# EAGLE board iBookG3Clamshell (EAGLE 9.6.2)
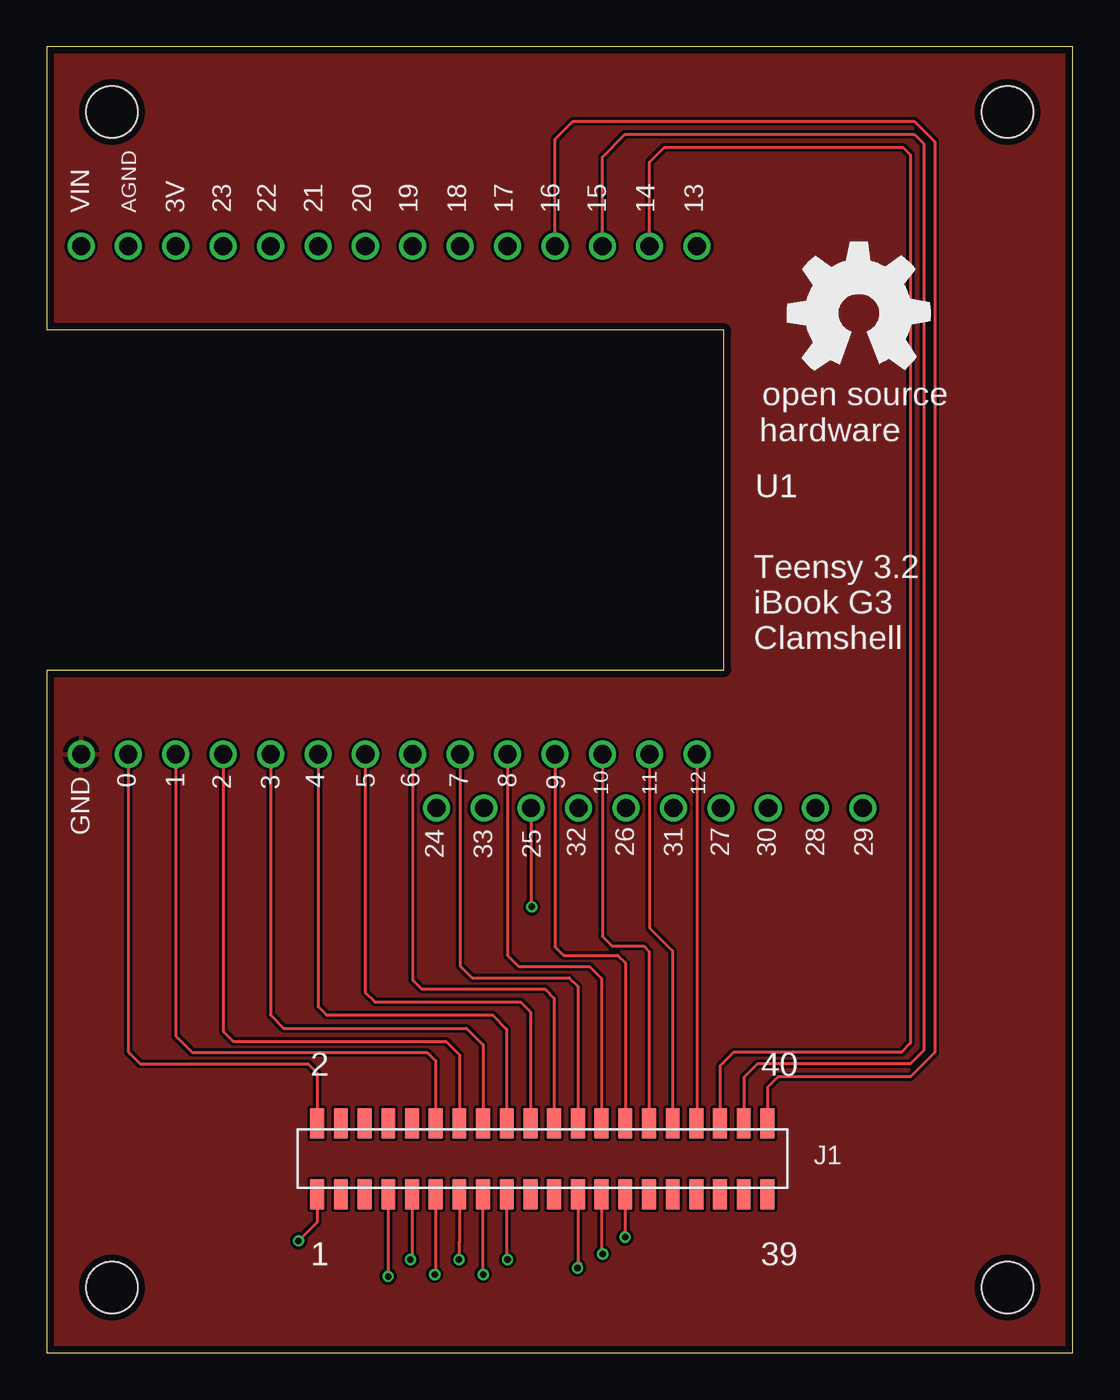
[diagram p0: board, top side]
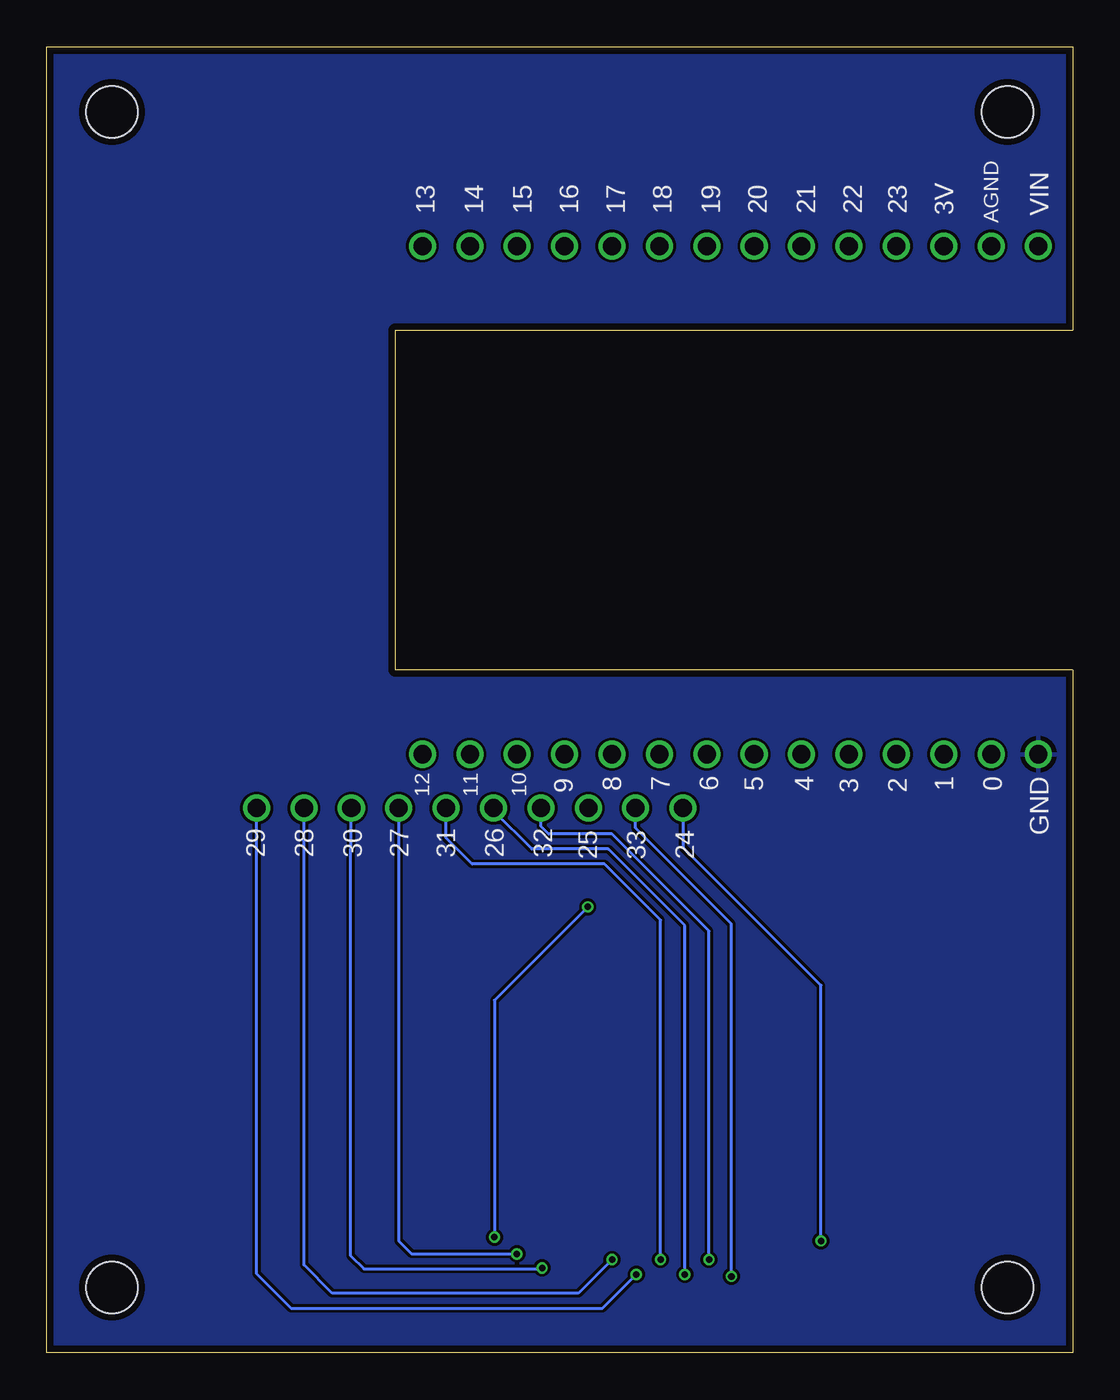
[diagram p1: board, bottom side, seen from below]

Size 55 x 70 mm. Coordinates in mm from the lower left corner, seen from the top.
Outline: 0,0 55,0 55,70 0,70 0,54.8 36.3,54.8 36.3,36.6 0,36.6 0,0
Copper layers (1*16): Top 0.035559375mm / dielectric 1.6mm / Bottom 0.035559375mm
Design rules "oshpark-2layer": minimum track width 6mil, minimum drill 10mil, track to track 6mil, track to pad 6mil, pad to pad 6mil, via to via 6mil, smd to smd 6mil, copper to edge 15mil, drill to drill 6mil, minimum pad ring 5mil, minimum via ring 5mil, stop-mask expansion 2.5mil, vias tented up to drill 0mil, thermal gap 10mil
Holes 2.75 mm at 3.5,66.5 3.5,3.5 51.5,3.5 51.5,66.5

## Footprints (pad centres in the part's own frame; a part is rotated, then mirrored left to right if it is on the bottom)
HDR127MET40FGVSMDR = smd 0.74 x 1.6: P$1 0,-0.8; P$2 0,3; P$3 1.27,-0.8; P$4 1.27,3; P$5 2.54,-0.8; P$6 2.54,3; P$7 3.81,-0.8; P$8 3.81,3; P$9 5.08,-0.8; P$10 5.08,3; P$11 6.35,-0.8; P$12 6.35,3; P$13 7.62,-0.8; P$14 7.62,3; P$15 8.89,-0.8; P$16 8.89,3; P$17 10.16,-0.8; P$18 10.16,3; P$19 11.43,-0.8; P$20 11.43,3; P$21 12.7,-0.8; P$22 12.7,3; P$23 13.97,-0.8; P$24 13.97,3; P$25 15.24,-0.8; P$26 15.24,3; P$27 16.51,-0.8; P$28 16.51,3; P$29 17.78,-0.8; P$30 17.78,3; P$31 19.05,-0.8; P$32 19.05,3; P$33 20.32,-0.8; P$34 20.32,3; P$35 21.59,-0.8; P$36 21.59,3; P$37 22.86,-0.8; P$38 22.86,3; P$39 24.13,-0.8; P$40 24.13,3
TEENSY3P2CUTOUT = drill 0.965: 0 -15.24,-13.62; 1 -12.7,-13.62; 2 -10.16,-13.62; 3 -7.62,-13.62; 3V -12.7,13.62; 4 -5.08,-13.62; 5 -2.54,-13.62; 6 0,-13.62; 7 2.54,-13.62; 8 5.08,-13.62; 9 7.62,-13.62; 10 10.16,-13.62; 11 12.7,-13.62; 12 15.24,-13.62; 13 15.24,13.62; 14 12.7,13.62; 15 10.16,13.62; 16 7.62,13.62; 17 5.08,13.62; 18 2.54,13.62; 19 0,13.62; 20 -2.54,13.62; 21 -5.08,13.62; 22 -7.62,13.62; 23 -10.16,13.62; 24 1.27,-16.51; 25 6.35,-16.51; 26 11.43,-16.51; 27 16.51,-16.51; 28 21.59,-16.51; 29 24.13,-16.51; 30 19.05,-16.51; 31 13.97,-16.51; 32 8.89,-16.51; 33 3.81,-16.51; AGND -15.24,13.62; GND -17.78,-13.62; VIN -17.78,13.62

## Placement (x,y rotation side)
J1  HDR127MET40FGVSMDR  [HDR127MET40FGVSMDR]  14.5,9.3 0 top
U1  Teensy 3.2  [TEENSY3P2CUTOUT]  19.62,45.7 0 top
U$1  [OSHW_8MM]  43.5,55.7 0 top

## Library data of the parts
J1 = HDR127MET40FGVSMDR
U1 = TEENSY3P2CUTOUTforMAC
U$1 = oshw

## Nets
0: J1.P$2 U1.0
1: J1.P$12 U1.1
2: J1.P$14 U1.2
3: J1.P$16 U1.3
4: J1.P$18 U1.4
5: J1.P$20 U1.5
6: J1.P$22 U1.6
7: J1.P$24 U1.7
8: J1.P$26 U1.8
9: J1.P$28 U1.9
10: J1.P$30 U1.10
11: J1.P$32 U1.11
12: J1.P$34 U1.12
13: U1.13
14: J1.P$36 U1.14
15: J1.P$38 U1.15
16: J1.P$40 U1.16
17: U1.17
18: U1.18
19: U1.19
20: U1.20
21: U1.21
22: U1.22
23: U1.23
24: J1.P$1 U1.24
25: J1.P$27 U1.25
26: J1.P$11 U1.26
27: J1.P$25 U1.27
28: J1.P$17 U1.28
29: J1.P$15 U1.29
30: J1.P$23 U1.30
31: J1.P$13 U1.31
32: J1.P$9 U1.32
33: J1.P$7 U1.33
GND: U1.GND

## Tracks (layer width: path | path; a pad name or v marks a point on that pad's centre or on a via)
0
  Top 0.152: U1.0 4.38,16.12 5,15.5 14,15.5 14.5,15 J1.P$2
1
  Top 0.152: U1.1 6.92,16.98 7.8,16.1 20.4,16.1 20.85,15.65 J1.P$12
2
  Top 0.152: U1.2 9.46,17.24 10,16.7 21.4,16.7 22.12,15.98 J1.P$14
3
  Top 0.152: U1.3 12,18.1 12.7,17.4 22.5,17.4 23.39,16.51 J1.P$16
4
  Top 0.152: U1.4 14.54,18.56 15,18.1 23.9,18.1 24.66,17.34 J1.P$18
5
  Top 0.152: U1.5 17.08,19.32 17.6,18.8 25.4,18.8 25.93,18.27 J1.P$20
6
  Top 0.152: U1.6 19.62,19.98 20.1,19.5 26.7,19.5 27.2,19 J1.P$22
7
  Top 0.152: U1.7 22.16,20.74 22.8,20.1 28,20.1 28.47,19.63 J1.P$24
8
  Top 0.152: U1.8 24.7,21.3 25.3,20.7 29.1,20.7 29.74,20.06 J1.P$26
9
  Top 0.152: U1.9 27.24,21.76 27.7,21.3 30.6,21.3 31.01,20.89 J1.P$28
10
  Top 0.152: U1.10 29.78,22.32 30.3,21.8 32,21.8 32.28,21.52 J1.P$30
11
  Top 0.152: U1.11 32.32,22.78 33.55,21.55 J1.P$32
12
  Top 0.152: U1.12 34.86,12.34 J1.P$34
14
  Top 0.152: U1.14 32.32,63.82 33.1,64.6 45.9,64.6 46.3,64.2 46.3,16.6 45.8,16.1 36.8,16.1 36.09,15.39 J1.P$36
15
  Top 0.152: U1.15 29.78,64.08 31,65.3 46.5,65.3 47,64.8 47,16.2 46.3,15.5 38.1,15.5 37.36,14.76 J1.P$38
16
  Top 0.152: U1.16 27.24,65.04 28.2,66 46.5,66 47.6,64.9 47.6,16.1 46.3,14.8 39.2,14.8 38.63,14.23 J1.P$40
24  (via drill 0.35)
  Top 0.152: J1.P$1 14.5,7 v13.5,6
  Bottom 0.152: v13.5,6 13.5,19.7 20.89,27.09 U1.24
25  (via drill 0.35)
  Top 0.152: U1.25 25.97,23.93 v26,23.9 | v31,6.2 v31.01,6.21 J1.P$27
  Bottom 0.152: v26,23.9 31,18.9 v31,6.2
26  (via drill 0.35)
  Top 0.152: J1.P$11 20.85,4.1 20.8,4.1 v20.8,4.2
  Bottom 0.152: U1.26 31.1,29.14 31.1,29.1 29,27 24.9,27 20.8,22.9 v20.8,4.2
27  (via drill 0.35)
  Top 0.152: v29.8,5.3 29.74,5.36 J1.P$25
  Bottom 0.152: U1.27 36.13,6 35.43,5.3 v29.8,5.3
28  (via drill 0.35)
  Top 0.152: J1.P$17 24.66,5.04 v24.7,5
  Bottom 0.152: v24.7,5 26.5,3.2 39.7,3.2 41.21,4.71 U1.28
29  (via drill 0.35)
  Top 0.152: v23.4,4.2 v23.39,4.21 J1.P$15
  Bottom 0.152: U1.29 43.75,4.25 41.9,2.4 25.2,2.4 v23.4,4.2
30  (via drill 0.35)
  Top 0.152: J1.P$23 28.47,4.93 28.65,4.75 v28.45,4.55
  Bottom 0.152: v28.45,4.55 28.45,4.5 38,4.5 38.7,5.2 38.7,27 38.67,27.03 U1.30
31  (via drill 0.35)
  Top 0.152: J1.P$13 22.12,5.92 22.1,5.9 v22.1,5
  Bottom 0.152: U1.31 33.59,27.59 32.2,26.2 25.1,26.2 22.1,23.2 v22.1,5
32  (via drill 0.35)
  Top 0.152: J1.P$9 19.58,5.18 19.5,5.1 v19.5,5
  Bottom 0.152: v19.5,5 19.5,22.6 24.7,27.8 28.1,27.8 28.51,28.21 U1.32
33  (via drill 0.35)
  Top 0.152: J1.P$7 v18.31,4.11 v18.3,4.1
  Bottom 0.152: v18.3,4.1 18.3,23 23.43,28.13 U1.33
GND
  pour Top: 0,0 0,36.6 0.3,36.6 36.3,36.6 36.3,37.4 36.3,54.8 35.9,54.8 0,54.8 0,55.3 0,70 0.5,70 55,70 55,69.7 55,0 54.3,0
  pour Bottom: 0,0 0,36.6 4.8,36.6 36.3,36.6 36.3,38.1 36.3,54.8 35.2,54.8 0,54.8 0,56 0,70 1.3,70 55,70 55,69 55,0 53.9,0

## Text on the board
tPlace: VIN | AGND | 3V | 23 | 22 | 21 | 20 | 19 | 18 | 17 | 16 | 15 | 14 | 13 | Teensy 3.2 / iBook G3 / Clamshell | GND | 0 | 1 | 2 | 3 | 4 | 5 | 6 | 7 | 8 | 9 | 10 | 11 | 12 | 32 | 26 | 31 | 27 | 30 | 28 | 29 | 24 | 33 | 25 | J1
bPlace: AGND | VIN | 3V | 23 | 22 | 21 | 20 | 19 | 18 | 17 | 16 | 15 | 14 | 13 | GND | 0 | 1 | 2 | 3 | 4 | 5 | 6 | 7 | 8 | 9 | 10 | 11 | 12 | 24 | 33 | 25 | 32 | 26 | 31 | 27 | 30 | 28 | 29